# Altium PCB PCB1.PcbDoc
Units mil, origin at the board's own origin, x right, y up, seen from the top; angles counter-clockwise.
Board outline 6000 x 4000 mil, 2 copper layers (Top Layer, Bottom Layer); 38 components, 0 nets, 625 pads, 0 vias.
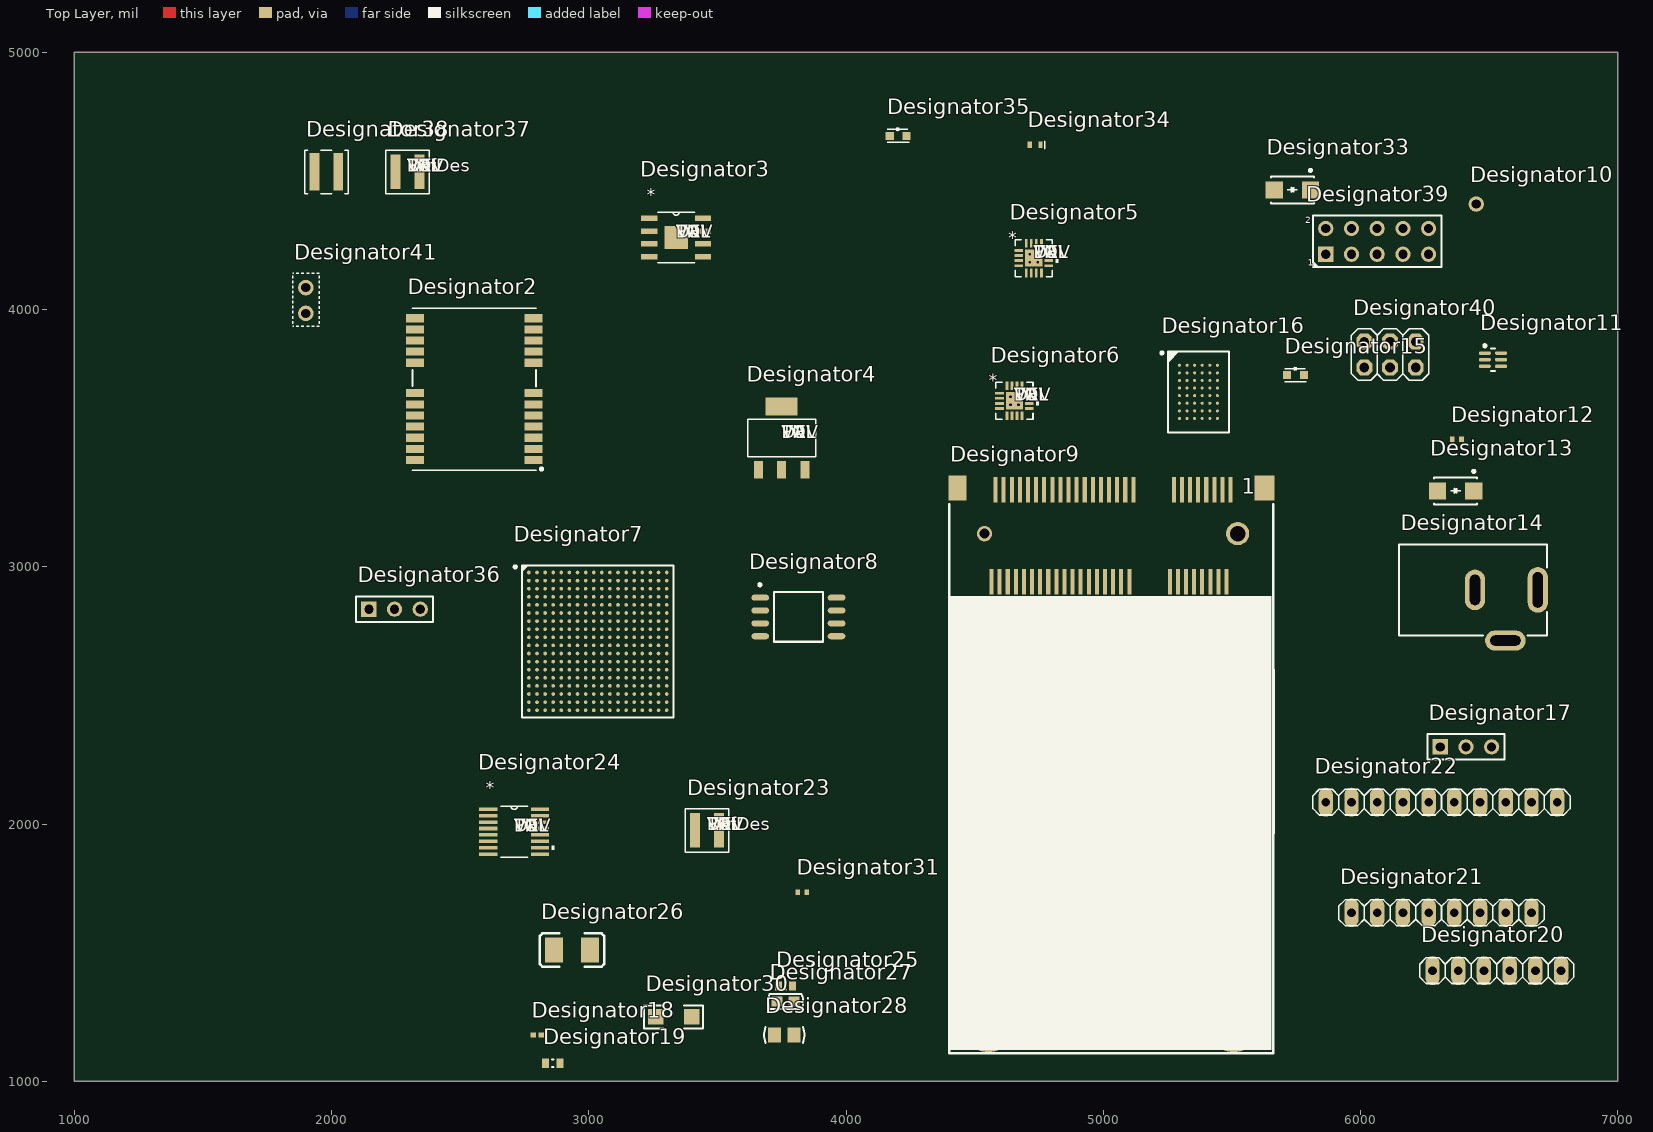
[diagram p0: Top Layer view]
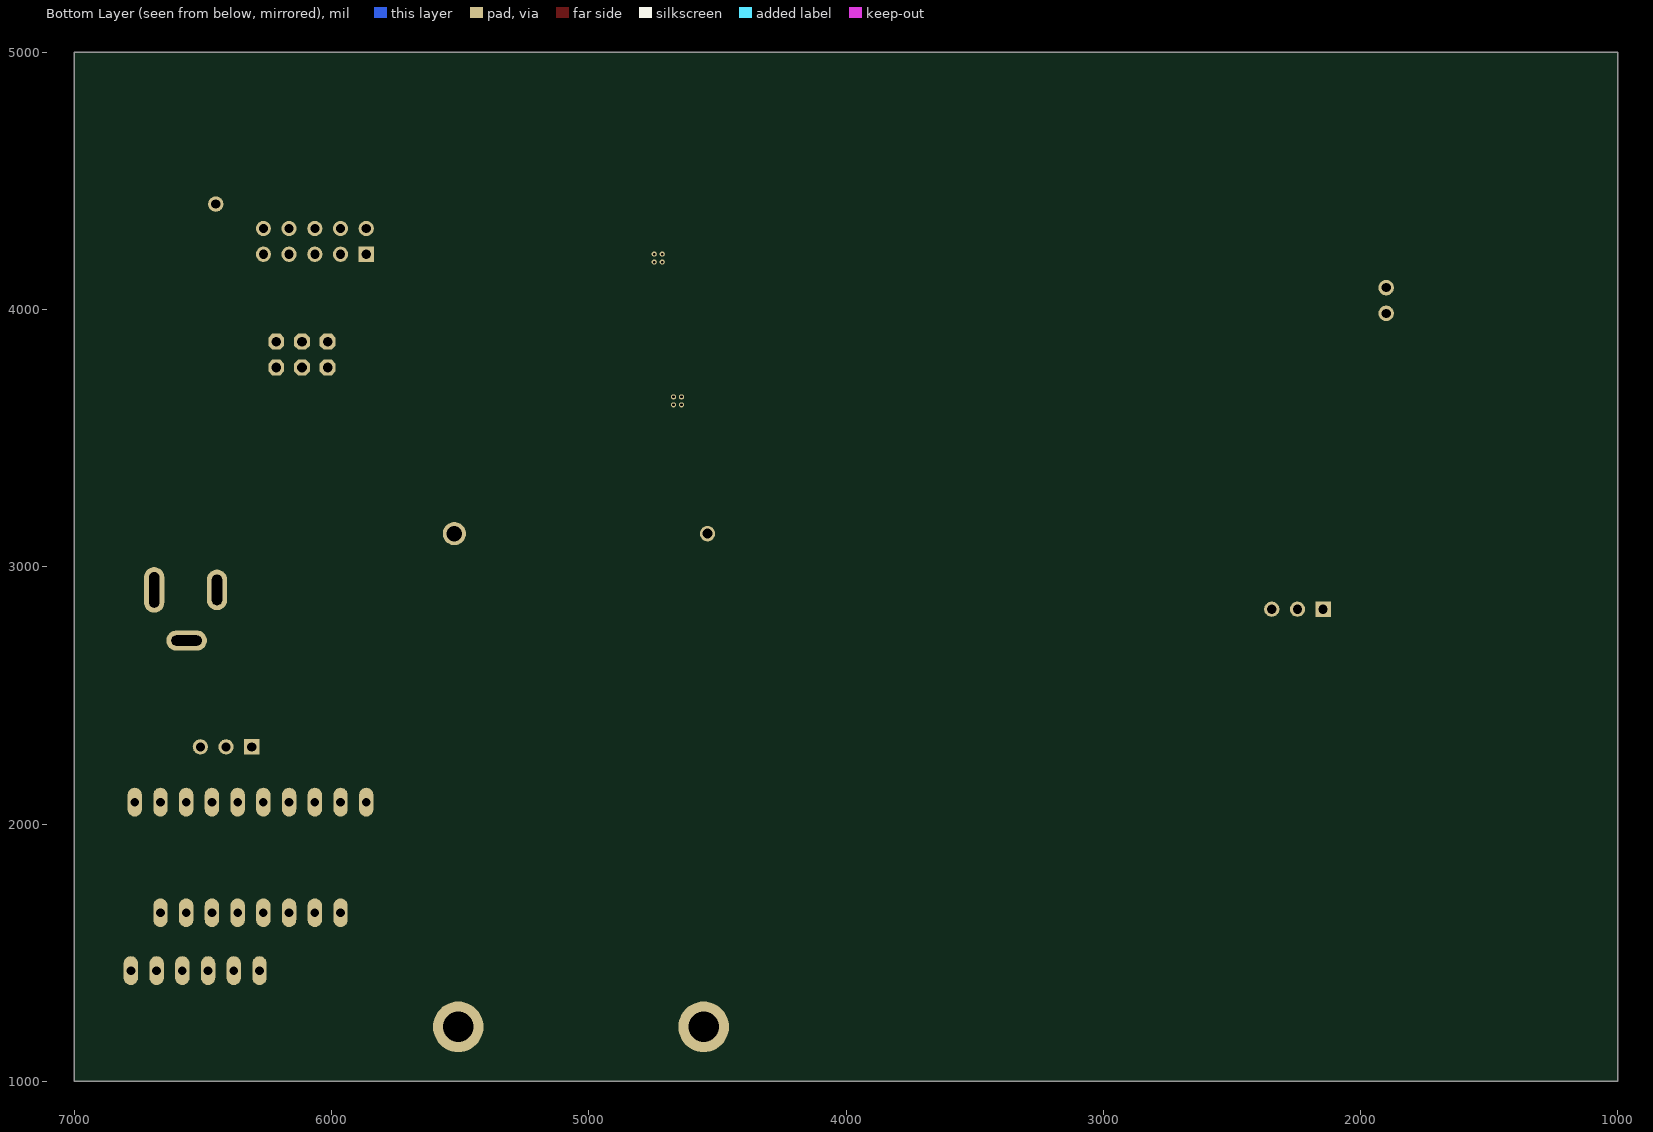
[diagram p1: Bottom Layer view, seen from below]

## Layer stack, top to bottom
Top Solder: solder mask 0.4, Solder Resist, Dk 3.5
Top Layer: signal copper 1.4
Dielectric 1: dielectric 12.6, FR-4, Dk 4.8
Bottom Layer: signal copper 1.4
Bottom Solder: solder mask 0.4, Solder Resist, Dk 3.5

## Board outline
1000,1000 7000,1000 7000,5000 1000,5000

## Design rules (kind name [scope] priority, off if disabled: settings)
Clearance [All] p1: gap=10
PolygonConnect [All] p1: connectstyle=Relief reliefconductorwidth=10 reliefentries=4 polygonreliefangle="90 Angle" airgapwidth=10
RoutingVias [All] p1: holewidth=28 width=50 viastyle="Through Hole" minholewidth=28 minwidth=50 maxholewidth=28 maxwidth=50
SolderMaskExpansion [All] p1: expansion=4
Width [All] p1: maxlimit=10 minlimit=10 preferedwidth=10
30 further rules are at their usual default settings.

## Components (designator, comment, footprint, x,y, rotation, side; value= is the part's Value field where it differs from the comment)
Designator2 "Comment" NEO 2785,3415 r0 top
Designator3 "Comment" MRA08A 3340,4280 r0 top
Designator4 "Comment" DCY4 3750,3500 r0 top
Designator5 "Comment" RGT16_1P7X1P7 4730,4200 r0 top
Designator6 "Comment" RGT16_1P7X1P7 4655,3645 r0 top
Designator7 "Comment" CSG324 3035,2710 r0 top
Designator8 "Comment" SOIC-8W 3815,2805 r0 top
Designator9 "Comment" MC2716 5495,3300 r0 top
Designator10 "Comment" TESTPOINT_TH 6450,4410 r0 top
Designator11 "Comment" TI-DCK6_L 6515,3805 r0 top
Designator12 "Comment" RESC0402(1005)40_L 6375,3495 r0 top
Designator13 "Comment" DO-214AC 6370,3295 r0 top
Designator14 "Comment" KLD-0202 6150,2910 r0 top
Designator15 "Comment" LED0603 5715,3745 r0 top
Designator16 "Comment" ISSI-TF-BGA-48-6000X8000DE 5370,3680 r0 top
Designator17 "Comment" HDR1X3 6310,2300 r0 top
Designator18 "Comment" CAPC0402(1005)60_L 2800,1180 r0 top
Designator19 "Comment" CAPC0603(1608)55_L 2860,1070 r0 top
Designator20 "Comment" 1X06 6530,1430 r0 top
Designator21 "Comment" 1X08 6315,1655 r0 top
Designator22 "Comment" 1X10@1 6315,2085 r0 top
Designator23 "Comment" XFL4020 3460,1975 r0 top
Designator24 "Comment" DBQ16 2710,1970 r0 top
Designator25 "Comment" CAPC0603(1608)55_L 3765,1370 r0 top
Designator26 "Comment" C-1210 2935,1510 r0 top
Designator27 "Comment" C-0603 3765,1310 r0 top
Designator28 "Comment" C-0805 3760,1180 r0 top
Designator30 "Comment" 1206 3330,1250 r0 top
Designator31 "Comment" RESC0402(1005)40_L 3830,1735 r0 top
Designator33 "Comment" DO-214AC 5735,4465 r0 top
Designator34 "Comment" LED_0402 4735,4640 r0 top
Designator35 "Comment" LED0603 4170,4675 r0 top
Designator36 "Comment" HDR1X3 2145,2835 r0 top
Designator37 "Comment" XFL4020 2295,4535 r0 top
Designator38 "Comment" XAL4020 1980,4535 r0 top
Designator39 "Comment" HDR2X5 5865,4215 r0 top
Designator40 "Comment" 2X03 6115,3825 r0 top
Designator41 "Comment" JMP1X2 1900,4085 r0 top

## Footprints (in the part's own frame and the unit in brackets; to place one, negate y for a bottom-side part, rotate by r counter-clockwise, add the part's x,y. Pads: shape width x height; smd on the part's side, far side on the other; paste and mask are expansions set on the pad)
1X06 [mil]
  oval 56x112 hole 34: 1(-250,0) 2(-150,0) 3(-50,0) 4(50,0) 5(150,0) 6(250,0)
  silkscreen extent -300,-50 300,50
1X08 [mil]
  oval 56x112 hole 34: 1(-350,0) 2(-250,0) 3(-150,0) 4(-50,0) 5(50,0) 6(150,0) 7(250,0) 8(350,0)
  silkscreen extent -400,-50 400,50
1X10@1 [mil]
  oval 56x112 hole 34: 1(-450,0) 2(-350,0) 3(-250,0) 4(-150,0) 5(-50,0) 6(50,0) 7(150,0) 8(250,0) 9(350,0) 10(450,0)
  silkscreen extent -500,-50 500,50
2X03 [mil] "2X03"
  oct 62x62 hole 38: 1(-100,-50) 2(-100,50) 3(0,-50) 4(0,50) 5(100,-50) 6(100,50)
  silkscreen extent -150,-100 150,100, body extent -150,-100 150,100, height 335
1206 [mil] "贴片元件"
  rect 60x60 smd: 1(-70,0) 2(70,0)
  silkscreen extent -115,-45 115,45, body extent -75,-35 75,35, height 39
C-0603 [mm] "贴片电容"
  rect 1.1x1 smd: 1(-0.85,0) 2(0.85,0)
  silkscreen extent -1.73,-0.76 1.73,0.76, body extent -0.8,-0.4 0.8,0.4, height 0.3
C-0805 [mm] "贴片电容"
  rect 1.3x1.5 smd: 1(-0.95,0) 2(0.95,0)
  silkscreen extent -2,-0.79 2,0.79, body extent -1,-0.6 1,0.6, height 0.95
C-1210 [mm] "贴片电容"
  rect 1.8x2.5 smd: 1(1.778,0) 2(-1.778,0)
  silkscreen extent -3.17,-1.65 3.17,1.65
CAPC0402(1005)60_L [mm]
  rect 0.52x0.52 smd: 1(-0.4,0) 2(0.4,0)
  body extent -0.55,-0.3 0.55,0.3, height 0.6
CAPC0603(1608)55_L [mm]
  rect 0.7x0.9 smd: 1(-0.7,0) 2(0.7,0)
  silkscreen extent -0.05,-0.35 0.05,0.35, body extent -0.87,-0.47 0.88,0.48, height 0.55
CSG324 [mm] "BGA, 324-Leads, Body 15x15mm, Pitch 0.8mm"
  round 0.36 smd: A1(-6.8,6.8) A2(-6,6.8) A3(-5.2,6.8) A4(-4.4,6.8) A5(-3.6,6.8) A6(-2.8,6.8) A7(-2,6.8) A8(-1.2,6.8) A9(-0.4,6.8) A10(0.4,6.8) A11(1.2,6.8) A12(2,6.8) A13(2.8,6.8) A14(3.6,6.8) A15(4.4,6.8) A16(5.2,6.8) A17(6,6.8) A18(6.8,6.8) B1(-6.8,6) B2(-6,6) B3(-5.2,6) B4(-4.4,6) B5(-3.6,6) B6(-2.8,6) B7(-2,6) B8(-1.2,6) B9(-0.4,6) B10(0.4,6) B11(1.2,6) B12(2,6) B13(2.8,6) B14(3.6,6) B15(4.4,6) B16(5.2,6) B17(6,6) B18(6.8,6) C1(-6.8,5.2) C2(-6,5.2) C3(-5.2,5.2) C4(-4.4,5.2) C5(-3.6,5.2) C6(-2.8,5.2) C7(-2,5.2) C8(-1.2,5.2) C9(-0.4,5.2) C10(0.4,5.2) C11(1.2,5.2) C12(2,5.2) C13(2.8,5.2) C14(3.6,5.2) C15(4.4,5.2) C16(5.2,5.2) C17(6,5.2) C18(6.8,5.2) D1(-6.8,4.4) D2(-6,4.4) D3(-5.2,4.4) D4(-4.4,4.4) D5(-3.6,4.4) D6(-2.8,4.4) D7(-2,4.4) D8(-1.2,4.4) D9(-0.4,4.4) D10(0.4,4.4) D11(1.2,4.4) D12(2,4.4) D13(2.8,4.4) D14(3.6,4.4) D15(4.4,4.4) D16(5.2,4.4) D17(6,4.4) D18(6.8,4.4) E1(-6.8,3.6) E2(-6,3.6) E3(-5.2,3.6) E4(-4.4,3.6) E5(-3.6,3.6) E6(-2.8,3.6) E7(-2,3.6) E8(-1.2,3.6) E9(-0.4,3.6) E10(0.4,3.6) E11(1.2,3.6) E12(2,3.6) E13(2.8,3.6) E14(3.6,3.6) E15(4.4,3.6) E16(5.2,3.6) E17(6,3.6) E18(6.8,3.6) F1(-6.8,2.8) F2(-6,2.8) F3(-5.2,2.8) F4(-4.4,2.8) F5(-3.6,2.8) F6(-2.8,2.8) F7(-2,2.8) F8(-1.2,2.8) F9(-0.4,2.8) F10(0.4,2.8) F11(1.2,2.8) F12(2,2.8) F13(2.8,2.8) F14(3.6,2.8) F15(4.4,2.8) F16(5.2,2.8) F17(6,2.8) F18(6.8,2.8) G1(-6.8,2) G2(-6,2) G3(-5.2,2) G4(-4.4,2) G5(-3.6,2) G6(-2.8,2) G7(-2,2) G8(-1.2,2) G9(-0.4,2) G10(0.4,2) G11(1.2,2) G12(2,2) G13(2.8,2) G14(3.6,2) G15(4.4,2) G16(5.2,2) G17(6,2) G18(6.8,2) H1(-6.8,1.2) H2(-6,1.2) H3(-5.2,1.2) H4(-4.4,1.2) H5(-3.6,1.2) H6(-2.8,1.2) H7(-2,1.2) H8(-1.2,1.2) H9(-0.4,1.2) H10(0.4,1.2) H11(1.2,1.2) H12(2,1.2) H13(2.8,1.2) H14(3.6,1.2) H15(4.4,1.2) H16(5.2,1.2) H17(6,1.2) H18(6.8,1.2) J1(-6.8,0.4) J2(-6,0.4) J3(-5.2,0.4) J4(-4.4,0.4) J5(-3.6,0.4) J6(-2.8,0.4) J7(-2,0.4) J8(-1.2,0.4) J9(-0.4,0.4) J10(0.4,0.4) J11(1.2,0.4) J12(2,0.4) J13(2.8,0.4) J14(3.6,0.4) J15(4.4,0.4) J16(5.2,0.4) J17(6,0.4) J18(6.8,0.4) K1(-6.8,-0.4) K2(-6,-0.4) K3(-5.2,-0.4) K4(-4.4,-0.4) K5(-3.6,-0.4) K6(-2.8,-0.4) K7(-2,-0.4) K8(-1.2,-0.4) K9(-0.4,-0.4) K10(0.4,-0.4) K11(1.2,-0.4) K12(2,-0.4) K13(2.8,-0.4) K14(3.6,-0.4) K15(4.4,-0.4) K16(5.2,-0.4) K17(6,-0.4) K18(6.8,-0.4) L1(-6.8,-1.2) L2(-6,-1.2) L3(-5.2,-1.2) L4(-4.4,-1.2) L5(-3.6,-1.2) L6(-2.8,-1.2) L7(-2,-1.2) L8(-1.2,-1.2) L9(-0.4,-1.2) L10(0.4,-1.2) L11(1.2,-1.2) L12(2,-1.2) L13(2.8,-1.2) L14(3.6,-1.2) L15(4.4,-1.2) L16(5.2,-1.2) L17(6,-1.2) L18(6.8,-1.2) M1(-6.8,-2) M2(-6,-2) M3(-5.2,-2) M4(-4.4,-2) M5(-3.6,-2) M6(-2.8,-2) M7(-2,-2) M8(-1.2,-2) M9(-0.4,-2) M10(0.4,-2) M11(1.2,-2) M12(2,-2) M13(2.8,-2) M14(3.6,-2) M15(4.4,-2) M16(5.2,-2) M17(6,-2) M18(6.8,-2) N1(-6.8,-2.8) N2(-6,-2.8) N3(-5.2,-2.8) N4(-4.4,-2.8) N5(-3.6,-2.8) N6(-2.8,-2.8) N7(-2,-2.8) N8(-1.2,-2.8) N9(-0.4,-2.8) N10(0.4,-2.8) N11(1.2,-2.8) N12(2,-2.8) N13(2.8,-2.8) N14(3.6,-2.8) N15(4.4,-2.8) N16(5.2,-2.8) N17(6,-2.8) N18(6.8,-2.8) P1(-6.8,-3.6) P2(-6,-3.6) P3(-5.2,-3.6) P4(-4.4,-3.6) P5(-3.6,-3.6) P6(-2.8,-3.6) P7(-2,-3.6) P8(-1.2,-3.6) P9(-0.4,-3.6) P10(0.4,-3.6) P11(1.2,-3.6) P12(2,-3.6) P13(2.8,-3.6) P14(3.6,-3.6) P15(4.4,-3.6) P16(5.2,-3.6) P17(6,-3.6) P18(6.8,-3.6) R1(-6.8,-4.4) R2(-6,-4.4) R3(-5.2,-4.4) R4(-4.4,-4.4) R5(-3.6,-4.4) R6(-2.8,-4.4) R7(-2,-4.4) R8(-1.2,-4.4) R9(-0.4,-4.4) R10(0.4,-4.4) R11(1.2,-4.4) R12(2,-4.4) R13(2.8,-4.4) R14(3.6,-4.4) R15(4.4,-4.4) R16(5.2,-4.4) R17(6,-4.4) R18(6.8,-4.4) T1(-6.8,-5.2) T2(-6,-5.2) T3(-5.2,-5.2) T4(-4.4,-5.2) T5(-3.6,-5.2) T6(-2.8,-5.2) T7(-2,-5.2) T8(-1.2,-5.2) T9(-0.4,-5.2) T10(0.4,-5.2) T11(1.2,-5.2) T12(2,-5.2) T13(2.8,-5.2) T14(3.6,-5.2) T15(4.4,-5.2) T16(5.2,-5.2) T17(6,-5.2) T18(6.8,-5.2) U1(-6.8,-6) U2(-6,-6) U3(-5.2,-6) U4(-4.4,-6) U5(-3.6,-6) U6(-2.8,-6) U7(-2,-6) U8(-1.2,-6) U9(-0.4,-6) U10(0.4,-6) U11(1.2,-6) U12(2,-6) U13(2.8,-6) U14(3.6,-6) U15(4.4,-6) U16(5.2,-6) U17(6,-6) U18(6.8,-6) V1(-6.8,-6.8) V2(-6,-6.8) V3(-5.2,-6.8) V4(-4.4,-6.8) V5(-3.6,-6.8) V6(-2.8,-6.8) V7(-2,-6.8) V8(-1.2,-6.8) V9(-0.4,-6.8) V10(0.4,-6.8) V11(1.2,-6.8) V12(2,-6.8) V13(2.8,-6.8) V14(3.6,-6.8) V15(4.4,-6.8) V16(5.2,-6.8) V17(6,-6.8) V18(6.8,-6.8)
  silkscreen extent -8.27,-7.5 7.5,7.5, body extent -7.5,-7.5 7.5,7.5, height 1.5
DBQ16 [mil]
  rect 71x14 smd: 1(-100.5,87.5) 2(-100.5,62.5) 3(-100.5,37.5) 4(-100.5,12.5) 5(-100.5,-12.5) 6(-100.5,-37.5) 7(-100.5,-62.5) 8(-100.5,-87.5) 9(100.5,-87.5) 10(100.5,-62.5) 11(100.5,-37.5) 12(100.5,-12.5) 13(100.5,12.5) 14(100.5,37.5) 15(100.5,62.5) 16(100.5,87.5)
  silkscreen extent -53,-98 156,98
DCY4 [mil]
  rect 35x69.5 smd: 1(-91,-122.75) 2(0,-122.75) 3(91,-122.75)
  rect 124x69.5 smd: 4(0,122.75)
  silkscreen extent -132,-73 132,73
DO-214AC [mm]
  rect 1.7x1.68 smd: 1(-1.79,0) 2(1.79,0)
  silkscreen extent -2.12,-1.33 2.12,2.06, body extent -2.57,-1.33 2.57,1.33, height 2.29
HDR1X3 [mm]
  rect 1.5x1.5 hole 0.9: 1(0,0)
  round 1.5 hole 0.9: 2(2.54,0) 3(5.08,0)
  silkscreen extent -1.27,-1.27 6.35,1.27
HDR2X5 [mm] "Connector; Header; 5x2 Position"
  rect 1.5x1.5 hole 0.9: 1(0,0)
  round 1.5 hole 0.9: 2(0,2.54) 3(2.54,0) 4(2.54,2.54) 5(5.08,0) 6(5.08,2.54) 7(7.62,0) 8(7.62,2.54) 9(10.16,0) 10(10.16,2.54)
  silkscreen extent -1.27,-1.27 11.43,3.81, body extent -1.27,-1.27 11.43,3.81, height 8.5
ISSI-TF-BGA-48-6000X8000DE [mm]
  round 0.3 smd: A1(-1.875,2.625) A2(-1.125,2.625) A3(-0.375,2.625) A4(0.375,2.625) A5(1.125,2.625) A6(1.875,2.625) B1(-1.875,1.875) B2(-1.125,1.875) B3(-0.375,1.875) B4(0.375,1.875) B5(1.125,1.875) B6(1.875,1.875) C1(-1.875,1.125) C2(-1.125,1.125) C3(-0.375,1.125) C4(0.375,1.125) C5(1.125,1.125) C6(1.875,1.125) D1(-1.875,0.375) D2(-1.125,0.375) D3(-0.375,0.375) D4(0.375,0.375) D5(1.125,0.375) D6(1.875,0.375) E1(-1.875,-0.375) E2(-1.125,-0.375) E3(-0.375,-0.375) E4(0.375,-0.375) E5(1.125,-0.375) E6(1.875,-0.375) F1(-1.875,-1.125) F2(-1.125,-1.125) F3(-0.375,-1.125) F4(0.375,-1.125) F5(1.125,-1.125) F6(1.875,-1.125) G1(-1.875,-1.875) G2(-1.125,-1.875) G3(-0.375,-1.875) G4(0.375,-1.875) G5(1.125,-1.875) G6(1.875,-1.875) H1(-1.875,-2.625) H2(-1.125,-2.625) H3(-0.375,-2.625) H4(0.375,-2.625) H5(1.125,-2.625) H6(1.875,-2.625)
  silkscreen extent -3.72,-4 3,4, body extent -3,-4 3,4, height 1.2
JMP1X2 [mil]
  round 60 hole 35.5: 1(0,0) 2(0,-100)
  silkscreen extent -51,-151 52,56, body extent -49,-154 49,46, height 323
KLD-0202 [mm]
  oval 2x4.5 hole 1 slot 3.5 at 90 deg: 1(13.7,0)
  oval 2x4 hole 1 slot 3 at 90 deg: 2(7.5,0)
  oval 4x2 hole 1 slot 3 at 0 deg: 3(10.5,-5)
  silkscreen extent 0,-4.5 14.6,4.5
LED0603 [mm]
  rect 0.8x0.8 smd: 1(0,0) 2(1.651,0)
  silkscreen extent -0.25,-0.64 1.91,0.8
LED_0402 [mm]
  rect 0.4x0.65 smd: 1(-0.525,0) 2(0.525,0)
  silkscreen extent 0.94,-0.38 0.94,0.38, body extent -0.52,-0.25 0.48,0.25, height 0.44
MC2716 [mm]
  round 1.524 hole 0.991: 0(-24.3,-4.35)
  round 2.286 hole 1.524: 0(0.7,-4.35)
  rect 0.4x2.5 smd: 1(0,0) 2(-0.4,-9.1) 3(-0.8,0) 4(-1.2,-9.1) 5(-1.6,0) 6(-2,-9.1) 7(-2.4,0) 8(-2.8,-9.1) 9(-3.2,0) 10(-3.6,-9.1) 11(-4,0) 12(-4.4,-9.1) 13(-4.8,0) 14(-5.2,-9.1) 15(-5.6,0) 16(-6,-9.1) 17(-9.6,0) 18(-10,-9.1) 19(-10.4,0) 20(-10.8,-9.1) 21(-11.2,0) 22(-11.6,-9.1) 23(-12,0) 24(-12.4,-9.1) 25(-12.8,0) 26(-13.2,-9.1) 27(-13.6,0) 28(-14,-9.1) 29(-14.4,0) 30(-14.8,-9.1) 31(-15.2,0) 32(-15.6,-9.1) 33(-16,0) 34(-16.4,-9.1) 35(-16.8,0) 36(-17.2,-9.1) 37(-17.6,0) 38(-18,-9.1) 39(-18.4,0) 40(-18.8,-9.1) 41(-19.2,0) 42(-19.6,-9.1) 43(-20,0) 44(-20.4,-9.1) 45(-20.8,0) 46(-21.2,-9.1) 47(-21.6,0) 48(-22,-9.1) 49(-22.4,0) 50(-22.8,-9.1) 51(-23.2,0) 52(-23.6,-9.1)
  round 5 hole 3: 53(-23.92,-53.05) 54(0.316,-53.05)
  rect 1.8x2.5 smd: 55(-26.95,0.15)
  rect 2x2.5 smd: 56(3.35,0.15)
  silkscreen extent -27.77,-55.66 4.24,-1.44
MRA08A [mil]
  rect 63x21 smd: 1(-104.5,75) 2(-104.5,25) 3(-104.5,-25) 4(-104.5,-75) 5(104.5,-75) 6(104.5,-25) 7(104.5,25) 8(104.5,75)
  rect 90x90 smd paste-44.5: 9(0,0)
  silkscreen extent -71,-98 71,98
NEO [mm] "u-blox NEO GNSS module"
  rect 1.8x0.8 smd paste-0.1: 1(0,0) 2(0,1.1) 3(0,2.2) 4(0,3.3) 5(0,4.4) 6(0,5.5) 7(0,6.6) 8(0,9.6) 9(0,10.7) 10(0,11.8) 11(0,12.9) 12(0,14) 13(-11.684,14) 14(-11.684,12.9) 15(-11.684,11.8) 16(-11.684,10.7) 17(-11.684,9.6) 18(-11.684,6.6) 19(-11.684,5.5) 20(-11.684,4.4) 21(-11.684,3.3) 22(-11.684,2.2) 23(-11.684,1.1) 24(-11.684,0)
  silkscreen extent -11.95,-1 0.85,15, body extent -11.95,-1 0.25,15, height 2.28
RESC0402(1005)40_L [mm]
  rect 0.45x0.55 smd: 1(-0.45,0) 2(0.45,0)
  body extent -0.52,-0.27 0.53,0.28, height 0.4
RGT16_1P7X1P7 [mm]
  rect 0.85x0.28 smd paste-0.412: 1(-1.475,0.75) 2(-1.475,0.25) 3(-1.475,-0.25) 4(-1.475,-0.75) 9(1.475,-0.75) 10(1.475,-0.25) 11(1.475,0.25) 12(1.475,0.75)
  rect 0.28x0.85 smd paste-0.412: 5(-0.75,-1.475) 6(-0.25,-1.475) 7(0.25,-1.475) 8(0.75,-1.475) 13(0.75,1.475) 14(0.25,1.475) 15(-0.25,1.475) 16(-0.75,1.475)
  rect 1.7x1.7 smd paste-0.837 mask-0.838: 17(0,0)
  round 0.508 / inner round 1.524 / far side round 0.508 hole 0.254: V(-0.394,-0.394) V(-0.394,0.394) V(0.394,-0.394) V(0.394,0.394)
  silkscreen extent -1.83,-1.83 2.41,1.83
SOIC-8W [mm] "SPI_FLASH"
  oval 1.75x0.6 smd: 1(-3.768,1.905) 2(-3.768,0.635) 3(-3.768,-0.635) 4(-3.768,-1.905) 5(3.768,-1.905) 6(3.768,-0.635) 7(3.768,0.635) 8(3.768,1.905)
  silkscreen extent -3.93,-2.45 2.41,3.3
TESTPOINT_TH [mil]
  round 60 hole 35.5: 1(0,0)
TI-DCK6_L [mm]
  oval 1.2x0.35 smd: 1(-0.8,0.65) 2(-0.8,0) 3(-0.8,-0.65) 4(0.8,-0.65) 5(0.8,0) 6(0.8,0.65)
  silkscreen extent -0.92,-1.1 0.2,1.5, body extent -0.7,-1.1 0.7,1.1, height 1.1
XAL4020 [mil]
  rect 38x146 smd: 1(-46.5,0) 2(46.5,0)
  silkscreen extent -84,-84 84,84
XFL4020 [mil]
  rect 38x134 smd: 1(-46.5,0) 2(46.5,0)
  silkscreen extent -84,-84 84,84

## Nets (pads, with @x,y where several pads share a name; then routed paths per layer and width w, separated by ;. In a path a pad name is that pad's centre, name@x,y a point inside that pad or via, vN(x,y) a via of type N, cw(c..) or ccw(c..) an arc to the next point about the centre after c; other vN are vias at no path point)
pads on no net: Designator2.1 Designator2.2 Designator2.3 Designator2.4 Designator2.5 Designator2.6 Designator2.7 Designator2.8 Designator2.9 Designator2.10 Designator2.11 Designator2.12 Designator2.13 Designator2.14 Designator2.15 Designator2.16 Designator2.17 Designator2.18 Designator2.19 Designator2.20 Designator2.21 Designator2.22 Designator2.23 Designator2.24 Designator3.1 Designator3.2 Designator3.3 Designator3.4 Designator3.5 Designator3.6 Designator3.7 Designator3.8 Designator3.9 Designator4.1 Designator4.2 Designator4.3 Designator4.4 Designator5.1 Designator5.2 Designator5.3 Designator5.4 Designator5.5 Designator5.6 Designator5.7 Designator5.8 Designator5.9 Designator5.10 Designator5.11 Designator5.12 Designator5.13 Designator5.14 Designator5.15 Designator5.16 Designator5.17 Designator5.V Designator6.1 Designator6.2 Designator6.3 Designator6.4 Designator6.5 Designator6.6 Designator6.7 Designator6.8 Designator6.9 Designator6.10 Designator6.11 Designator6.12 Designator6.13 Designator6.14 Designator6.15 Designator6.16 Designator6.17 Designator6.V Designator7.A1 Designator7.A2 Designator7.A3 Designator7.A4 Designator7.A5 Designator7.A6 Designator7.A7 Designator7.A8 Designator7.A9 Designator7.A10 Designator7.A11 Designator7.A12 Designator7.A13 Designator7.A14 Designator7.A15 Designator7.A16 Designator7.A17 Designator7.A18 Designator7.B1 Designator7.B2 Designator7.B3 Designator7.B4 Designator7.B5 Designator7.B6 Designator7.B7 Designator7.B8 Designator7.B9 Designator7.B10 Designator7.B11 Designator7.B12 Designator7.B13 Designator7.B14 Designator7.B15 Designator7.B16 Designator7.B17 Designator7.B18 Designator7.C1 Designator7.C2 Designator7.C3 Designator7.C4 Designator7.C5 Designator7.C6 Designator7.C7 Designator7.C8 Designator7.C9 Designator7.C10 Designator7.C11 Designator7.C12 Designator7.C13 Designator7.C14 Designator7.C15 Designator7.C16 Designator7.C17 Designator7.C18 Designator7.D1 Designator7.D2 Designator7.D3 Designator7.D4 Designator7.D5 Designator7.D6 Designator7.D7 Designator7.D8 Designator7.D9 Designator7.D10 Designator7.D11 Designator7.D12 Designator7.D13 Designator7.D14 Designator7.D15 Designator7.D16 Designator7.D17 Designator7.D18 Designator7.E1 Designator7.E2 Designator7.E3 Designator7.E4 Designator7.E5 Designator7.E6 Designator7.E7 Designator7.E8 Designator7.E9 Designator7.E10 Designator7.E11 Designator7.E12 Designator7.E13 Designator7.E14 Designator7.E15 Designator7.E16 Designator7.E17 Designator7.E18 Designator7.F1 Designator7.F2 Designator7.F3 Designator7.F4 Designator7.F5 Designator7.F6 Designator7.F7 Designator7.F8 Designator7.F9 Designator7.F10 Designator7.F11 Designator7.F12 Designator7.F13 Designator7.F14 Designator7.F15 Designator7.F16 Designator7.F17 Designator7.F18 Designator7.G1 Designator7.G2 Designator7.G3 Designator7.G4 Designator7.G5 Designator7.G6 Designator7.G7 Designator7.G8 Designator7.G9 Designator7.G10 Designator7.G11 Designator7.G12 Designator7.G13 Designator7.G14 Designator7.G15 Designator7.G16 Designator7.G17 Designator7.G18 Designator7.H1 Designator7.H2 Designator7.H3 Designator7.H4 Designator7.H5 Designator7.H6 Designator7.H7 Designator7.H8 Designator7.H9 Designator7.H10 Designator7.H11 Designator7.H12 Designator7.H13 Designator7.H14 Designator7.H15 Designator7.H16 Designator7.H17 Designator7.H18 Designator7.J1 Designator7.J2 Designator7.J3 Designator7.J4 Designator7.J5 Designator7.J6 Designator7.J7 Designator7.J8 Designator7.J9 Designator7.J10 Designator7.J11 Designator7.J12 Designator7.J13 Designator7.J14 Designator7.J15 Designator7.J16 Designator7.J17 Designator7.J18 Designator7.K1 Designator7.K2 Designator7.K3 Designator7.K4 Designator7.K5 Designator7.K6 Designator7.K7 Designator7.K8 Designator7.K9 Designator7.K10 Designator7.K11 Designator7.K12 Designator7.K13 Designator7.K14 Designator7.K15 Designator7.K16 Designator7.K17 Designator7.K18 Designator7.L1 Designator7.L2 Designator7.L3 Designator7.L4 Designator7.L5 Designator7.L6 Designator7.L7 Designator7.L8 Designator7.L9 Designator7.L10 Designator7.L11 Designator7.L12 Designator7.L13 Designator7.L14 Designator7.L15 Designator7.L16 Designator7.L17 Designator7.L18 Designator7.M1 Designator7.M2 Designator7.M3 Designator7.M4 Designator7.M5 Designator7.M6 Designator7.M7 Designator7.M8 Designator7.M9 Designator7.M10 Designator7.M11 Designator7.M12 Designator7.M13 Designator7.M14 Designator7.M15 Designator7.M16 Designator7.M17 Designator7.M18 Designator7.N1 Designator7.N2 Designator7.N3 Designator7.N4 Designator7.N5 Designator7.N6 Designator7.N7 Designator7.N8 Designator7.N9 Designator7.N10 Designator7.N11 Designator7.N12 Designator7.N13 Designator7.N14 Designator7.N15 Designator7.N16 Designator7.N17 Designator7.N18 Designator7.P1 Designator7.P2 Designator7.P3 Designator7.P4 Designator7.P5 Designator7.P6 Designator7.P7 Designator7.P8 Designator7.P9 Designator7.P10 Designator7.P11 Designator7.P12 Designator7.P13 Designator7.P14 Designator7.P15 Designator7.P16 Designator7.P17 Designator7.P18 Designator7.R1 Designator7.R2 Designator7.R3 Designator7.R4 Designator7.R5 Designator7.R6 Designator7.R7 Designator7.R8 Designator7.R9 Designator7.R10 Designator7.R11 Designator7.R12 Designator7.R13 Designator7.R14 Designator7.R15 Designator7.R16 Designator7.R17 Designator7.R18 Designator7.T1 Designator7.T2 Designator7.T3 Designator7.T4 Designator7.T5 Designator7.T6 Designator7.T7 Designator7.T8 Designator7.T9 Designator7.T10 Designator7.T11 Designator7.T12 Designator7.T13 Designator7.T14 Designator7.T15 Designator7.T16 Designator7.T17 Designator7.T18 Designator7.U1 Designator7.U2 Designator7.U3 Designator7.U4 Designator7.U5 Designator7.U6 Designator7.U7 Designator7.U8 Designator7.U9 Designator7.U10 Designator7.U11 Designator7.U12 Designator7.U13 Designator7.U14 Designator7.U15 Designator7.U16 Designator7.U17 Designator7.U18 Designator7.V1 Designator7.V2 Designator7.V3 Designator7.V4 Designator7.V5 Designator7.V6 Designator7.V7 Designator7.V8 Designator7.V9 Designator7.V10 Designator7.V11 Designator7.V12 Designator7.V13 Designator7.V14 Designator7.V15 Designator7.V16 Designator7.V17 Designator7.V18 Designator8.1 Designator8.2 Designator8.3 Designator8.4 Designator8.5 Designator8.6 Designator8.7 Designator8.8 Designator9.0 Designator9.1 Designator9.2 Designator9.3 Designator9.4 Designator9.5 Designator9.6 Designator9.7 Designator9.8 Designator9.9 Designator9.10 Designator9.11 Designator9.12 Designator9.13 Designator9.14 Designator9.15 Designator9.16 Designator9.17 Designator9.18 Designator9.19 Designator9.20 Designator9.21 Designator9.22 Designator9.23 Designator9.24 Designator9.25 Designator9.26 Designator9.27 Designator9.28 Designator9.29 Designator9.30 Designator9.31 Designator9.32 Designator9.33 Designator9.34 Designator9.35 Designator9.36 Designator9.37 Designator9.38 Designator9.39 Designator9.40 Designator9.41 Designator9.42 Designator9.43 Designator9.44 Designator9.45 Designator9.46 Designator9.47 Designator9.48 Designator9.49 Designator9.50 Designator9.51 Designator9.52 Designator9.53 Designator9.54 Designator9.55 Designator9.56 Designator10.1 Designator11.1 Designator11.2 Designator11.3 Designator11.4 Designator11.5 Designator11.6 Designator12.1 Designator12.2 Designator13.1 Designator13.2 Designator14.1 Designator14.2 Designator14.3 Designator15.1 Designator15.2 Designator16.A1 Designator16.A2 Designator16.A3 Designator16.A4 Designator16.A5 Designator16.A6 Designator16.B1 Designator16.B2 Designator16.B3 Designator16.B4 Designator16.B5 Designator16.B6 Designator16.C1 Designator16.C2 Designator16.C3 Designator16.C4 Designator16.C5 Designator16.C6 Designator16.D1 Designator16.D2 Designator16.D3 Designator16.D4 Designator16.D5 Designator16.D6 Designator16.E1 Designator16.E2 Designator16.E3 Designator16.E4 Designator16.E5 Designator16.E6 Designator16.F1 Designator16.F2 Designator16.F3 Designator16.F4 Designator16.F5 Designator16.F6 Designator16.G1 Designator16.G2 Designator16.G3 Designator16.G4 Designator16.G5 Designator16.G6 Designator16.H1 Designator16.H2 Designator16.H3 Designator16.H4 Designator16.H5 Designator16.H6 Designator17.1 Designator17.2 Designator17.3 Designator18.1 Designator18.2 Designator19.1 Designator19.2 Designator20.1 Designator20.2 Designator20.3 Designator20.4 Designator20.5 Designator20.6 Designator21.1 Designator21.2 Designator21.3 Designator21.4 Designator21.5 Designator21.6 Designator21.7 Designator21.8 Designator22.1 Designator22.2 Designator22.3 Designator22.4 Designator22.5 Designator22.6 Designator22.7 Designator22.8 Designator22.9 Designator22.10 Designator23.1 Designator23.2 Designator24.1 Designator24.2 Designator24.3 Designator24.4 Designator24.5 Designator24.6 Designator24.7 Designator24.8 Designator24.9 Designator24.10 Designator24.11 Designator24.12 Designator24.13 Designator24.14 Designator24.15 Designator24.16 Designator25.1 Designator25.2 Designator26.1 Designator26.2 Designator27.1 Designator27.2 Designator28.1 Designator28.2 Designator30.1 Designator30.2 Designator31.1 Designator31.2 Designator33.1 Designator33.2 Designator34.1 Designator34.2 Designator35.1 Designator35.2 Designator36.1 Designator36.2 Designator36.3 Designator37.1 Designator37.2 Designator38.1 Designator38.2 Designator39.1 Designator39.2 Designator39.3 Designator39.4 Designator39.5 Designator39.6 Designator39.7 Designator39.8 Designator39.9 Designator39.10 Designator40.1 Designator40.2 Designator40.3 Designator40.4 Designator40.5 Designator40.6 Designator41.1 Designator41.2

## Text inside footprints (layer, text, board x,y; h text height)
Designator3: Top Overlay "TOL" at 3340,4280 h50; Top Overlay "VAL" at 3340,4280 h50; Top Overlay "DEV" at 3340,4280 h50; Top Overlay "PN" at 3340,4280 h50; Top Overlay "*" at 3225.5,4421 h50; Mechanical 13 "RefDes2" at 3340,4280 h50; Mechanical 13 "*" at 3225.5,4421 h50
Designator4: Top Overlay "TOL" at 3750,3500 h50; Top Overlay "VAL" at 3750,3500 h50; Top Overlay "DEV" at 3750,3500 h50; Top Overlay "PN" at 3750,3500 h50; Mechanical 13 "RefDes2" at 3750,3500 h50
Designator5: Top Overlay "TOL" at 4730,4200 h50; Top Overlay "VAL" at 4730,4200 h50; Top Overlay "DEV" at 4730,4200 h50; Top Overlay "PN" at 4730,4200 h50; Top Overlay "*" at 4630.2,4254.37 h50; Mechanical 13 "RefDes2" at 4730,4200 h50; Mechanical 13 "*" at 4630.2,4254.37 h50
Designator6: Top Overlay "TOL" at 4655,3645 h50; Top Overlay "VAL" at 4655,3645 h50; Top Overlay "DEV" at 4655,3645 h50; Top Overlay "PN" at 4655,3645 h50; Top Overlay "*" at 4555.2,3699.37 h50; Mechanical 13 "RefDes2" at 4655,3645 h50; Mechanical 13 "*" at 4555.2,3699.37 h50
Designator9: Top Overlay "1" at 5538.3,3283.52 h60
Designator23: Top Overlay "TOL" at 3460,1975 h50; Top Overlay "VAL" at 3460,1975 h50; Top Overlay "DEV" at 3460,1975 h50; Top Overlay "PN" at 3460,1975 h50; Top Overlay "DEV" at 3460,1975 h50; Top Overlay "RefDes" at 3460,1975 h50
Designator24: Top Overlay "TOL" at 2710,1970 h50; Top Overlay "VAL" at 2710,1970 h50; Top Overlay "DEV" at 2710,1970 h50; Top Overlay "PN" at 2710,1970 h50; Top Overlay "*" at 2599.5,2116.5 h50; Mechanical 13 "RefDes2" at 2710,1970 h50; Mechanical 13 "*" at 2599.5,2116.5 h50
Designator37: Top Overlay "TOL" at 2295,4535 h50; Top Overlay "VAL" at 2295,4535 h50; Top Overlay "DEV" at 2295,4535 h50; Top Overlay "PN" at 2295,4535 h50; Top Overlay "DEV" at 2295,4535 h50; Top Overlay "RefDes" at 2295,4535 h50
Designator39: Top Overlay "2" at 5785,4335 h25; Top Overlay "1" at 5795,4170 h25